# EAGLE board Logitech_K120 (EAGLE 9.6.2)
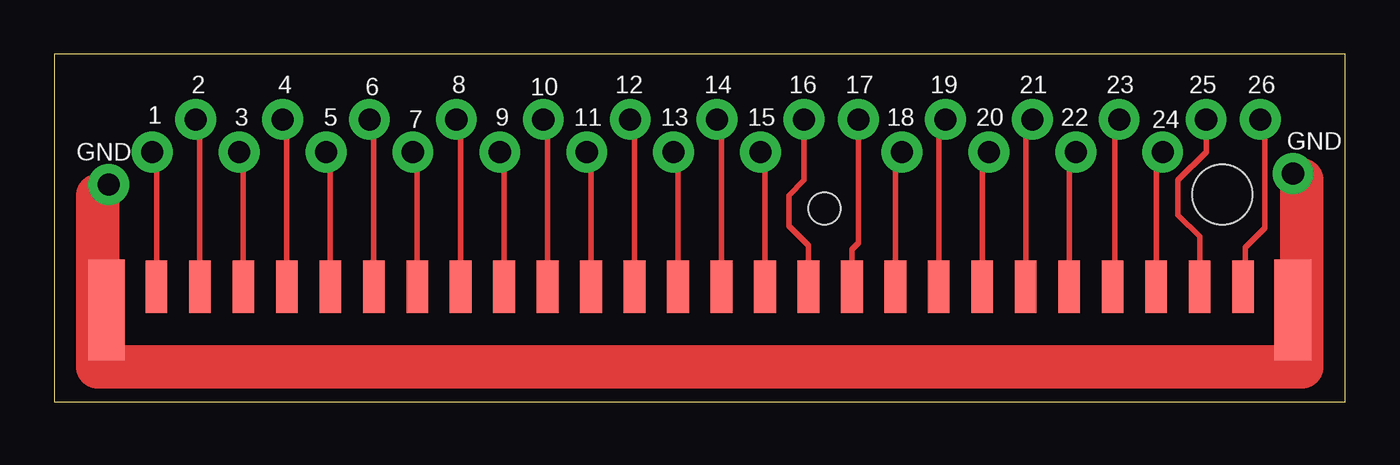
[diagram p0: board, top side]

Size 59.4 x 16 mm. Coordinates in mm from the lower left corner, seen from the top.
Outline: 0,0 59.4,0 59.4,16 0,16 0,0
Copper layers (1*16): Top 0.035559375mm / dielectric 1.6mm / Bottom 0.035559375mm
Design rules "oshpark-2layer": minimum track width 6mil, minimum drill 10mil, track to track 6mil, track to pad 6mil, pad to pad 6mil, via to via 6mil, smd to smd 6mil, copper to edge 15mil, drill to drill 6mil, minimum pad ring 5mil, minimum via ring 5mil, stop-mask expansion 2.5mil, vias tented up to drill 0mil, thermal gap 10mil
Holes 1.45 mm at 35.44,8.9
Holes 2.75 mm at 53.75,9.55

## Footprints (pad centres in the part's own frame; a part is rotated, then mirrored left to right if it is on the bottom)
LOGITECH_K120_FPC = smd 1 x 2.4: P$1 0,0; P$2 2,0; P$3 4,0; P$4 6,0; P$5 8,0; P$6 10,0; P$7 12,0; P$8 14,0; P$9 16,0; P$10 18,0; P$11 20,0; P$12 22,0; P$13 24,0; P$14 26,0; P$15 28,0; P$16 30,0; P$17 32,0; P$18 34,0; P$19 36,0; P$20 38,0; P$21 40,0; P$22 42,0; P$23 44,0; P$24 46,0; P$25 48,0; P$26 50,0 | smd 1.7 x 4.65: P$27 -2.3,-1.07; P$28 52.3,-1.07
1X01_NO_SILK = drill 1.016 pad 1.88: 1 0,0

## Placement (x,y rotation side)
E$1  [LOGITECH_K120_FPC]  4.7,5.3 0 top
E$2  [1X01_NO_SILK]  6.5,13 0 top
E$3  [1X01_NO_SILK]  8.5,11.5 0 top
E$4  [1X01_NO_SILK]  10.5,13 0 top
E$5  [1X01_NO_SILK]  12.5,11.5 0 top
E$6  [1X01_NO_SILK]  14.5,13 0 top
E$7  [1X01_NO_SILK]  16.5,11.5 0 top
E$8  [1X01_NO_SILK]  18.5,13 0 top
E$9  [1X01_NO_SILK]  20.5,11.5 0 top
E$10  [1X01_NO_SILK]  22.5,13 0 top
E$11  [1X01_NO_SILK]  24.5,11.5 0 top
E$12  [1X01_NO_SILK]  26.5,13 0 top
E$13  [1X01_NO_SILK]  28.5,11.5 0 top
E$14  [1X01_NO_SILK]  30.5,13 0 top
E$15  [1X01_NO_SILK]  32.5,11.5 0 top
E$16  [1X01_NO_SILK]  34.5,13 0 top
E$17  [1X01_NO_SILK]  37,13 0 top
E$18  [1X01_NO_SILK]  4.5,11.5 0 top
E$19  [1X01_NO_SILK]  39,11.5 0 top
E$20  [1X01_NO_SILK]  41,13 0 top
E$21  [1X01_NO_SILK]  43,11.5 0 top
E$22  [1X01_NO_SILK]  45,13 0 top
E$23  [1X01_NO_SILK]  47,11.5 0 top
E$24  [1X01_NO_SILK]  49,13 0 top
E$25  [1X01_NO_SILK]  51,11.5 0 top
E$26  [1X01_NO_SILK]  53,13 0 top
E$27  [1X01_NO_SILK]  55.5,13 0 top
E$28  [1X01_NO_SILK]  57,10.5 0 top
E$29  [1X01_NO_SILK]  2.5,10 0 top

## Library data of the parts
E$1 = Logitech_K120_FPC
E$2-E$29 = SparkFun-Connectors

## Nets
S$6: E$23.1
S$8: E$21.1
S$9: E$20.1
S$10: E$19.1
S$14: E$14.1
S$16: E$12.1
S$17: E$11.1
S$18: E$10.1
S$20: E$8.1
S$21: E$7.1
S$22: E$6.1
S$23: E$5.1
S$24: E$4.1
S$25: E$3.1
S$27: E$18.1

## Tracks (layer width: path | path; a pad name or v marks a point on that pad's centre or on a via)
S$1
  Top 2: 2,9.5 2,1.6 57.4,1.6 57.4,10.2
S$2
  Top 0.254: 55.7,13 55.7,8 54.8,7.1 54.8,5.4
S$3
  Top 0.254: 53,12.9 53,11.5 51.7,10.2 51.7,8.6 52.7,7.6 52.7,5.6
S$4
  Top 0.254: 51.1,11.4 50.7,11 50.7,5.8
S$5
  Top 0.254: 49.1,13 49.1,12.7 48.8,12.4 48.8,5.8
S$6
  Top 0.254: E$23.1 46.7,11.2 46.7,5.7
S$7
  Top 0.254: 45,12.9 44.7,12.6 44.7,5.7
S$8
  Top 0.254: E$21.1 42.7,11.2 42.7,5.7
S$9
  Top 0.254: E$20.1 40.7,12.7 40.7,5.5
S$10
  Top 0.254: E$19.1 38.7,11.2 38.7,5.7
S$11
  Top 0.254: 37,12.9 37,7.3 36.7,7 36.7,5.6
S$12
  Top 0.254: 34.5,12.9 34.5,10.2 33.8,9.5 33.8,8.1 34.7,7.2 34.7,5.8
S$13
  Top 0.254: 32.5,11.4 32.7,11.2 32.7,5.7
S$14
  Top 0.254: E$14.1 30.7,12.8 30.7,5.6
S$15
  Top 0.254: 28.5,11.6 28.7,11.4 28.7,5.7
S$16
  Top 0.254: E$12.1 26.7,12.8 26.7,5.6
S$17
  Top 0.254: E$11.1 24.7,11.3 24.7,5.8
S$18
  Top 0.254: E$10.1 22.7,12.8 22.7,5.7
S$19
  Top 0.254: 20.6,11.4 20.7,11.3 20.7,5.6
S$20
  Top 0.254: E$8.1 18.7,12.8 18.7,5.5
S$21
  Top 0.254: E$7.1 16.7,11.3 16.7,5.6
S$22
  Top 0.254: E$6.1 14.7,12.8 14.7,5.6
S$23
  Top 0.254: E$5.1 12.7,11.3 12.7,5.7
S$24
  Top 0.254: E$4.1 10.7,12.8 10.7,5.5
S$25
  Top 0.254: E$3.1 8.7,11.3 8.7,5.6
S$26
  Top 0.254: 6.4,13.1 6.7,12.8 6.7,5.5
S$27
  Top 0.254: E$18.1 4.7,11.3 4.7,5.4

## Text on the board
tPlace: 2 | 4 | 6 | 8 | 10 | 12 | 14 | 16 | 17 | 19 | 21 | 23 | 25 | 26 | 1 | 3 | 5 | 7 | 9 | 11 | 13 | 15 | 18 | 20 | 22 | 24 | GND | GND